# EAGLE board Rocekt_test_stand_2.0 (EAGLE 9.5.2)
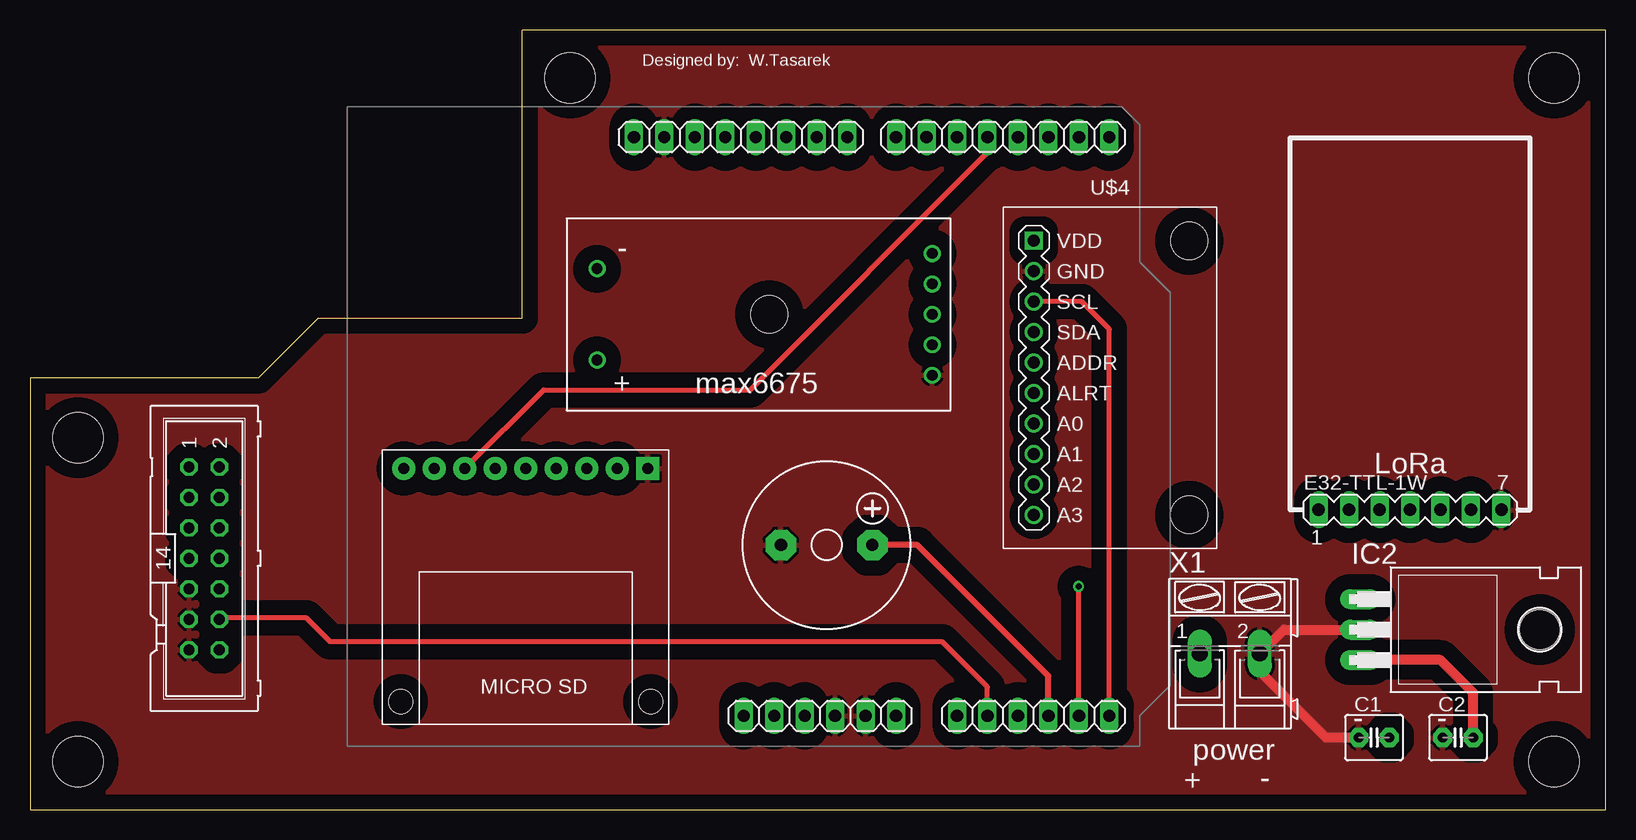
[diagram p0: board, top side]
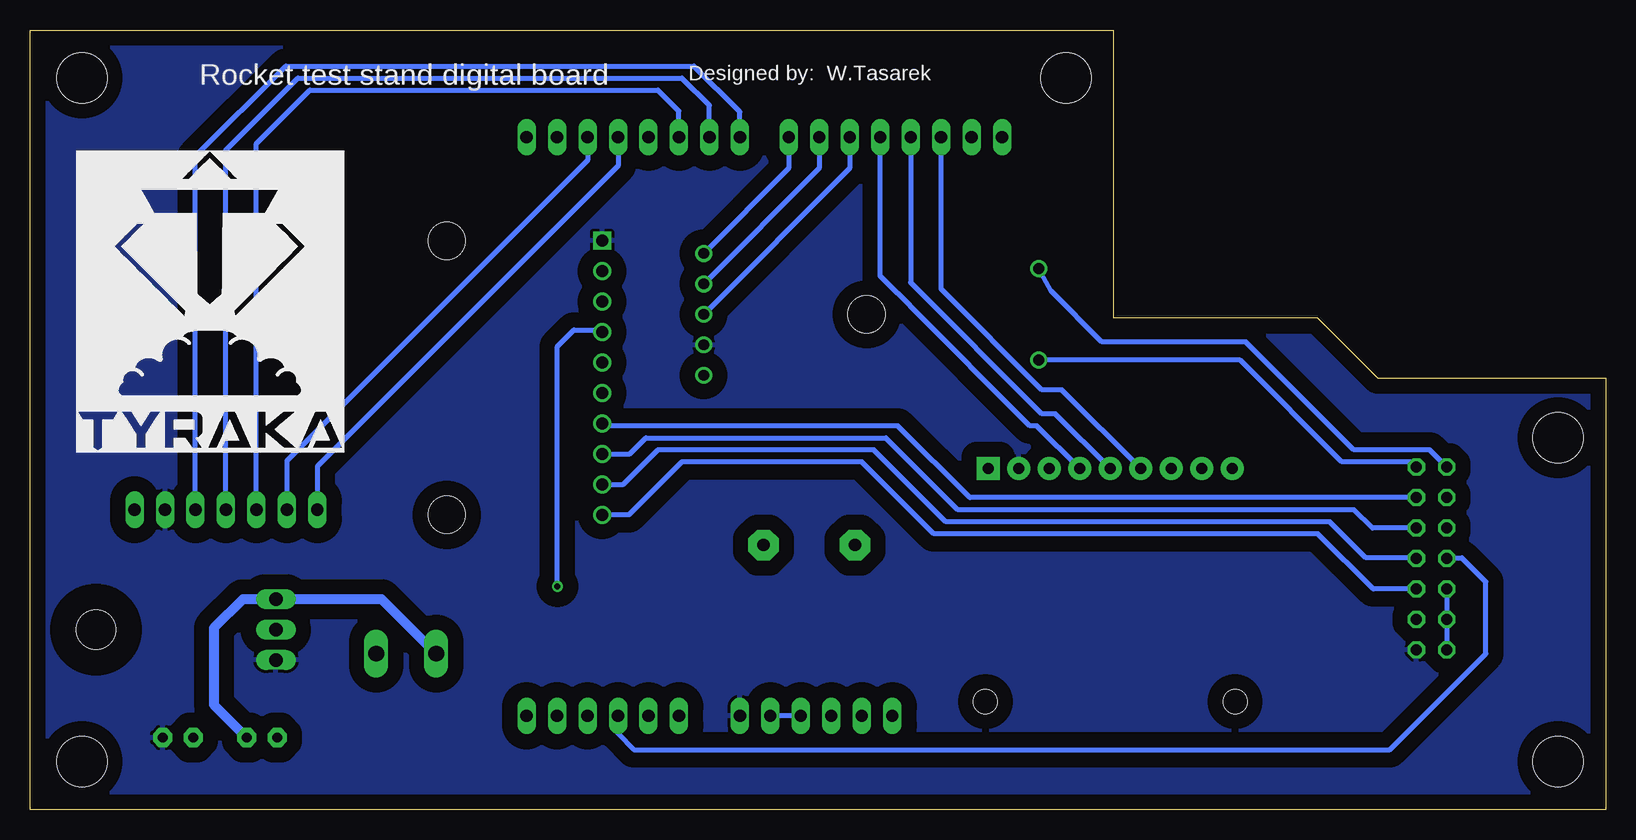
[diagram p1: board, bottom side, seen from below]

Size 131.33 x 65 mm. Coordinates in mm from the lower left corner, seen from the top.
Outline: 0,0 131.33,0 131.33,65 41,65 41,41 24,41 19,36 0,36 0,0
Copper layers (1*16): Top 0.035mm / dielectric 1.5mm / Bottom 0.035mm
Design rules "default": minimum track width 6mil, minimum drill 0.35mm, track to track 6mil, track to pad 6mil, pad to pad 6mil, via to via 6mil, smd to smd 6mil, copper to edge 40mil, drill to drill 6mil, minimum pad ring 10mil, minimum via ring 8mil, stop-mask expansion 4mil, vias tented up to drill 0mil, thermal gap 10mil
Holes 4.2 mm at 45,61 127,61 127,4 4,4 4,31

## Footprints (pad centres in the part's own frame; a part is rotated, then mirrored left to right if it is on the bottom)
C2.5-4 = drill 0.813 pad 1.6 octagon: 1 -1.27,0; 2 1.27,0
MA07-1 = drill 1.016 long: 1 -7.62,0; 2 -5.08,0; 3 -2.54,0; 4 0,0; 5 2.54,0; 6 5.08,0; 7 7.62,0
ARDUINO2009 = drill 1.016 long: 1 33.02,2.54; 2 35.56,2.54; 3 38.1,2.54; 4 40.64,2.54; 5 43.18,2.54; 6 45.72,2.54; 7 50.8,2.54; 8 53.34,2.54; 9 55.88,2.54; 10 58.42,2.54; 11 60.96,2.54; 12 63.5,2.54; 13 63.5,50.8; 14 60.96,50.8; 15 58.42,50.8; 16 55.88,50.8; 17 53.34,50.8; 18 50.8,50.8; 19 48.26,50.8; 20 45.72,50.8; 21 41.656,50.8; 22 39.116,50.8; 23 36.576,50.8; 24 34.036,50.8; 25 31.496,50.8; 26 28.956,50.8; 27 26.416,50.8; 28 23.876,50.8
TO220H = drill 1.118 long: 1 -2.54,-10.16; 2 0,-10.16; 3 2.54,-10.16 | hole 3.302: 0,4.826
MICRO_SD = drill 0.9 pad 1.93 square: P1 -9.906,10.16 | drill 0.9 pad 1.93: P2 -9.906,7.62; P3 -9.906,5.08; P4 -9.906,2.54; P5 -9.906,0; P6 -9.906,-2.54; P7 -9.906,-5.08; P8 -9.906,-7.62; P9 -9.906,-10.16 | hole 2: 9.525,-10.414; 9.525,10.414
F/CM12P = drill 1.016 pad 2.54 octagon: + 3.81,0; - -3.81,0
ML14 = drill 0.914 octagon: 1 -7.62,-1.27; 2 -7.62,1.27; 3 -5.08,-1.27; 4 -5.08,1.27; 5 -2.54,-1.27; 6 -2.54,1.27; 7 0,-1.27; 8 0,1.27; 9 2.54,-1.27; 10 2.54,1.27; 11 5.08,-1.27; 12 5.08,1.27; 13 7.62,-1.27; 14 7.62,1.27
MAX6675_FOOTPRINT = drill 0.9: + 29.464,11.811; - 29.464,4.191; CS 1.524,5.461; GND 1.524,13.081; SCK 1.524,8.001; SO 1.524,2.921; VCC 1.524,10.541 | hole 3.1: 15.113,8.001
ADC-4CH-ADS1115 = drill 1 square: 1 -6.35,11.43 | drill 1: 2 -6.35,8.89; 3 -6.35,6.35; 4 -6.35,3.81; 5 -6.35,1.27; 6 -6.35,-1.27; 7 -6.35,-3.81; 8 -6.35,-6.35; 9 -6.35,-8.89; 10 -6.35,-11.43 | hole 3.1: 6.604,11.43; 6.604,-11.43
AK300/2 = drill 1.321 long: 1 -2.515,0; 2 2.489,0

## Placement (x,y rotation side)
C1  [C2.5-4]  112,6 0 top
C2  [C2.5-4]  119,6 0 top
E32-TTL-1W  [MA07-1]  115,25 0 top
IC1  [ARDUINO2009]  26.45,5.27 0 top
IC2  7805T  [TO220H]  121,15 270 top
SD1  MICRO_SD  [MICRO_SD]  41.31,18.53 270 top
SG1  F/CM12P  [F/CM12P]  66.39,22.06 0 top
SV2  [ML14]  14.52,20.93 270 top
U$2  MAX6675  [MAX6675_FOOTPRINT]  76.72,49.29 180 top
U$4  ADC-4CH-ADS1115  [ADC-4CH-ADS1115]  90,36 0 top
X1  [AK300/2]  100,13 0 top

## Library data of the parts
C1 C2 = capacitor-wima
E32-TTL-1W = con-lstb; OC_FARNELL: unknown; OC_NEWARK: unknown
IC1 = arduino
IC2 = linear
SD1 = 111_microsd
SG1 = buzzer; OC_FARNELL: unknown; OC_NEWARK: unknown
SV2 = con-harting-ml; OC_FARNELL: unknown; OC_NEWARK: unknown
U$2 = 111_max6675
U$4 = ads1115
X1 = con-ptr500; OC_FARNELL: unknown; OC_NEWARK: unknown

## Nets
4: IC1.17 SD1.P7
8: IC1.21 U$2.SO
9: IC1.22 U$2.CS
10: IC1.23 U$2.SCK
+3V3: IC1.2
+5V: IC1.3
AUX: E32-TTL-1W.5 IC1.20
CLK: IC1.26 SD1.P6
GND: C1.1 C2.1 E32-TTL-1W.7 IC1.4 IC1.5 IC1.27 IC2.2 SD1.P1 SG1.- SV2.9 SV2.11 SV2.13 U$2.GND U$4.2 X1.2
IGNITE: IC1.9 SV2.7
LED: IC1.8 SV2.12
M0: E32-TTL-1W.1 IC1.16
M1: E32-TTL-1W.2 IC1.15
MISO: IC1.25 SD1.P5
MOSI: IC1.24 SD1.P4
N$1: SV2.2 U$2.+
N$2: IC1.10 SG1.+
N$3: SV2.1 U$2.-
N$4: SV2.4 U$4.7
N$5: SV2.10 U$4.10
N$6: SV2.8 U$4.9
N$7: SV2.6 U$4.8
N$8: C1.2 IC2.1 X1.1
RX: E32-TTL-1W.3 IC1.18
SCL: IC1.12 U$4.3
SDA: IC1.11 U$4.4
TX: E32-TTL-1W.4 IC1.19
VCC: C2.2 E32-TTL-1W.6 IC1.6 IC2.3 SD1.P2 SV2.14 U$2.VCC U$4.1

## Tracks (layer width: path | path; a pad name or v marks a point on that pad's centre or on a via)
4
  Top 0.406: SD1.P7 42.79,35 60,35 79.79,54.79 IC1.17
8
  Bottom 0.406: IC1.21 68.11,53.46 U$2.SO
9
  Bottom 0.406: IC1.22 65.57,53.46 U$2.CS
10
  Bottom 0.406: IC1.23 63.03,53.46 U$2.SCK
AUX
  Bottom 0.406: IC1.20 72.17,58.17 76,62 110,62 117.54,54.46 E32-TTL-1W.5
CLK
  Bottom 0.406: IC1.26 55.41,43.41 47,35 45.33,35 SD1.P6
GND
  Top 0.813: IC2.2 104.49,15 X1.2 102.49,11.51 108,6 C1.1
  Bottom 0.406: SV2.9 SV2.11 SV2.13 | IC1.4 IC1.5
  pour Top (isolate 1.27, rank 2): 0,36 0,0 131,0 131,65 41,65 41,41 24,41 19,36
IGNITE
  Bottom 0.406: SV2.7 13.18,21 12,21 10,19 10,13 18,5 81,5 82.33,6.33 IC1.9
LED
  Top 0.406: IC1.8 79.79,10.21 76,14 25,14 23,16 15.94,16 SV2.12
M0
  Bottom 0.406: IC1.16 82.33,53.67 107.38,28.62 E32-TTL-1W.1
M1
  Bottom 0.406: IC1.15 84.87,54.13 109.92,29.08 E32-TTL-1W.2
MISO
  Bottom 0.406: IC1.25 57.95,43.95 47,33 45.87,33 SD1.P5
MOSI
  Bottom 0.406: IC1.24 60.49,44.49 59.01,43.01 58.99,43.01 57.98,42 57.98,41.98 48,32 47.41,32 SD1.P4
N$1
  Bottom 0.406: SV2.2 16.24,29 22,29 30.48,37.48 U$2.+
N$2
  Top 0.508: IC1.10 84.87,11.13 73.94,22.06 SG1.+
N$3
  Bottom 0.406: SV2.1 14.7,30 21,30 30,39 42,39 46.24,43.24 U$2.-
N$4
  Bottom 0.406: U$4.7 83.46,32 59,32 53.01,26.01 SV2.4
N$5
  Bottom 0.406: SV2.10 19.39,18.39 24,23 56,23 62,29 77,29 81.43,24.57 U$4.10
N$6
  Bottom 0.406: U$4.9 81.89,27.11 79,30 61,30 55,24 23,24 20,21 15.86,21 SV2.8
N$7
  Bottom 0.406: U$4.8 81.35,29.65 80,31 60,31 54,25 21,25 19.47,23.47 SV2.6
N$8
  Bottom 0.813: X1.1 102.03,17.54 IC2.1 113.59,17.54 116,15.13 116,8.73 C1.2
RX
  Bottom 0.406: IC1.18 77.25,58.25 79,60 108,60 112.46,55.54 E32-TTL-1W.3
SCL
  Top 0.406: IC1.12 89.95,40.05 87.65,42.35 U$4.3
SDA  (via drill 0.5)
  Top 0.406: IC1.11 87.41,18.57 v87.38,18.61
  Bottom 0.406: v87.38,18.61 87.38,38.62 86,40 83.84,40 U$4.4
TX
  Bottom 0.406: IC1.19 74.71,58.71 77,61 109,61 115,55 E32-TTL-1W.4
VCC
  Top 0.813: C2.2 120.27,9.73 117.54,12.46 IC2.3
  pour Bottom (isolate 1.27, rank 2): 41,41 24,41 19,36 0,36 0,0 131,0 131,65 41,65

## Text on the board
tPlace: Designed by: W.Tasarek | LoRa | - | - | power | + | -
bPlace: Designed by: W.Tasarek | Rocket test stand digital board | C:/Users/Wiciu/Desktop/tyraka1_mono.bmp